# EAGLE board Maduino Zero 4G LTE CAT1 SIM7600X v1.3 (EAGLE 6.1), part 1 of 2
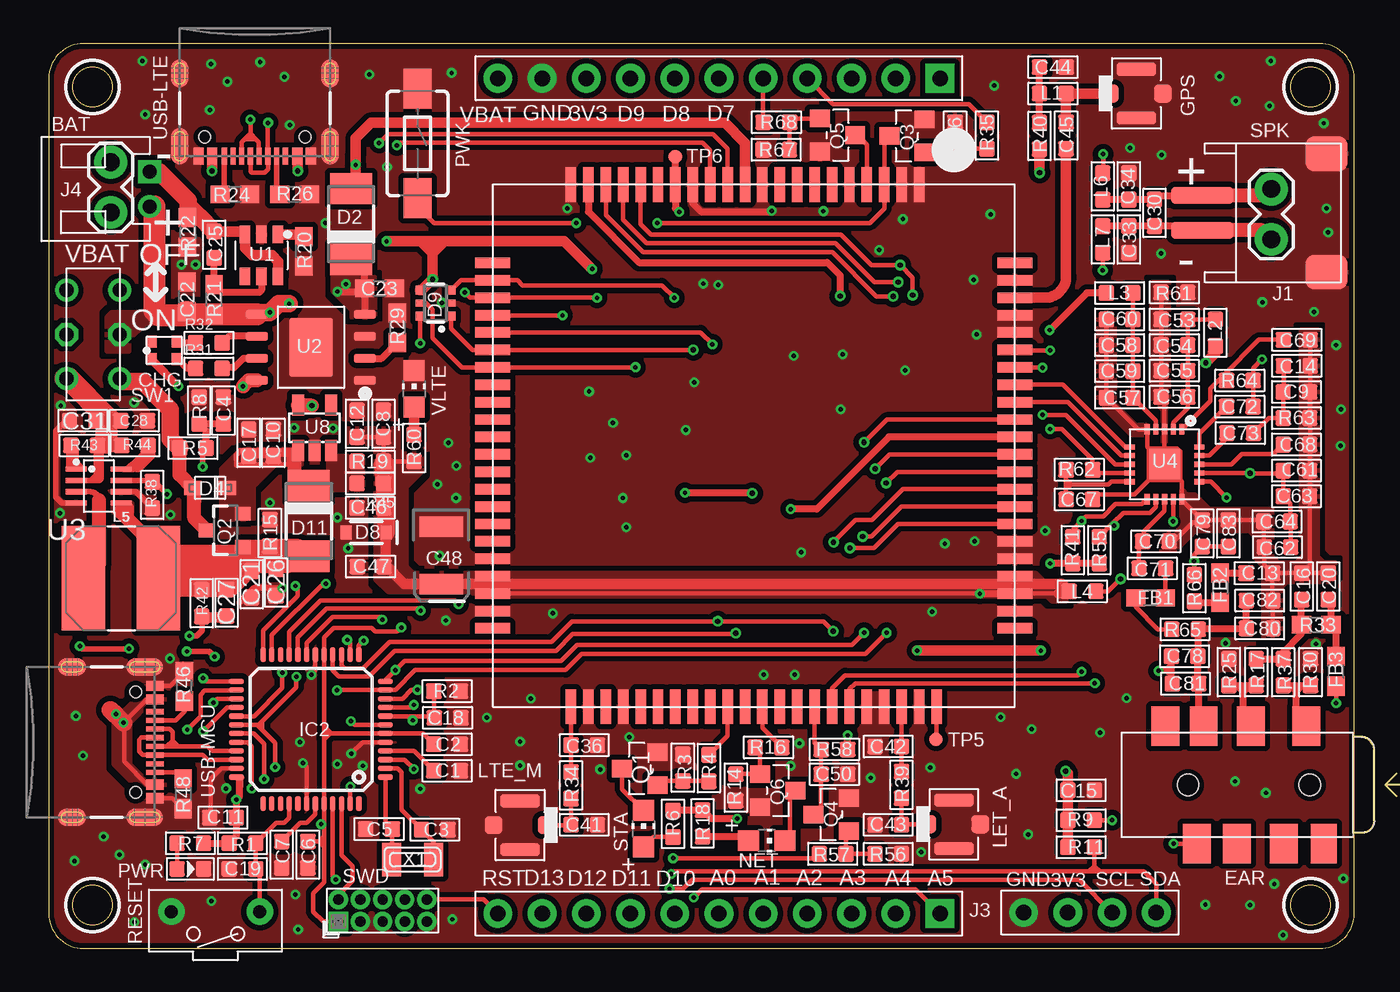
[diagram p0: board, top side]
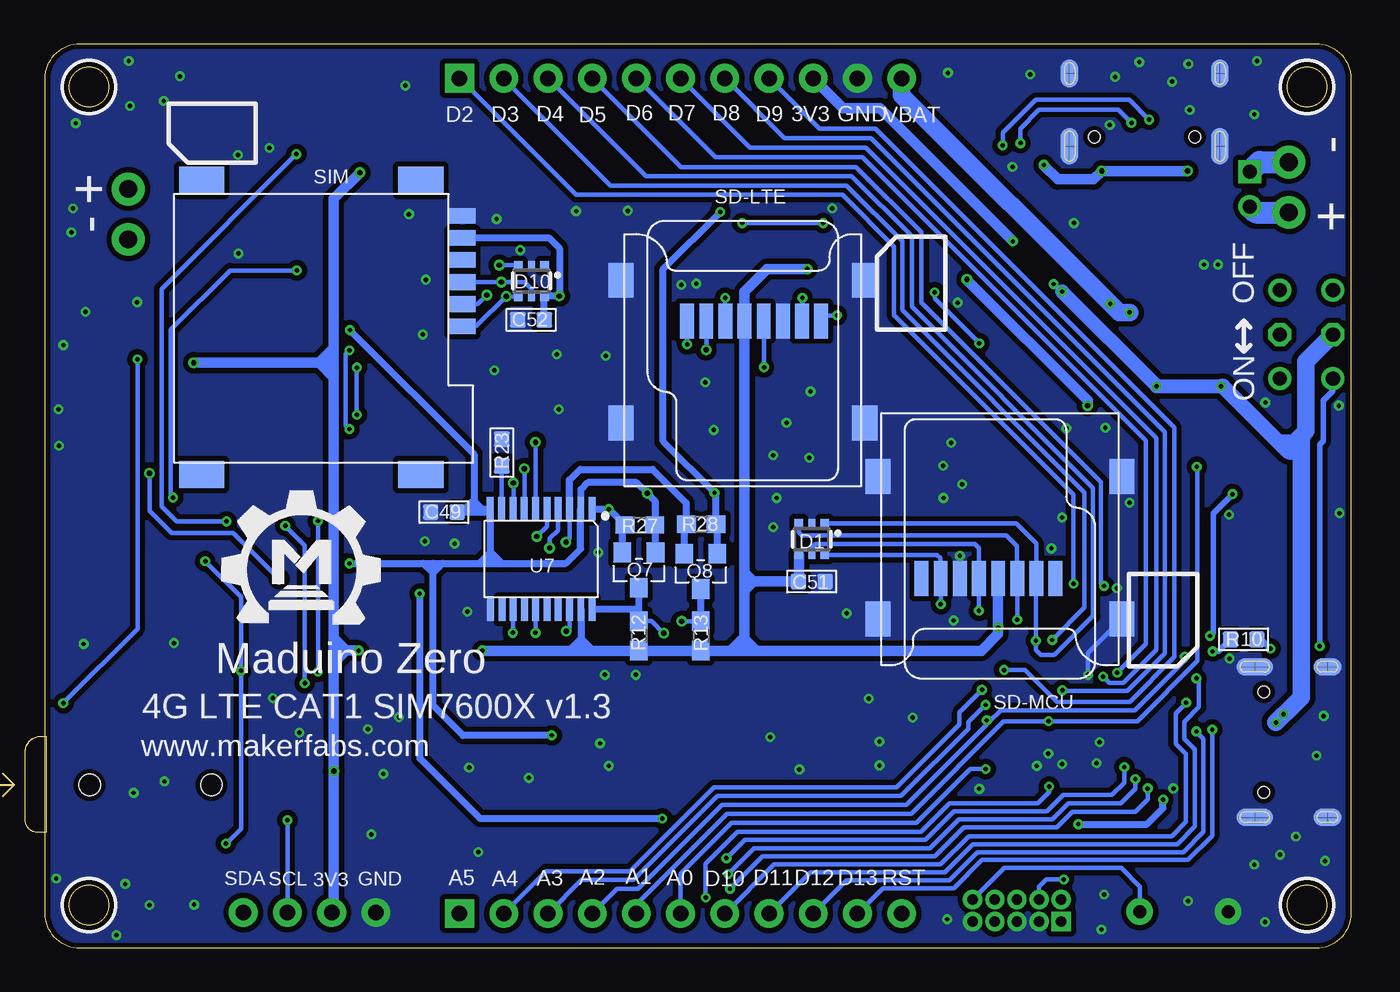
[diagram p1: board, bottom side, seen from below]

Size 75 x 52 mm. Coordinates in mm from the lower left corner, seen from the top.
Outline: 2,0 73,0 arc90 75,2 75,50 arc90 73,52 2,52 arc90 0,50 0,2 arc90 2,0
Outline: circle at 72.5,2.5 radius 1.14
Outline: circle at 72.5,49.5 radius 1.14
Outline: circle at 2.5,2.5 radius 1.14
Outline: circle at 2.5,49.5 radius 1.14
Copper layers (1*16): Top 0.035mm / dielectric 1.5mm / Bottom 0.035mm
Design rules: minimum track width 6mil, minimum drill 10mil, track to track 6mil, track to pad 6mil, pad to pad 6mil, via to via 6mil, smd to smd 0mil, copper to edge 10mil, drill to drill 10mil, minimum pad ring 10mil, minimum via ring 6mil, stop-mask expansion 2mil, vias tented up to drill 30mil, thermal gap 0mil
Net classes: 0 default: width 0.203 mm; 2 gnd: width 0.305 mm, drill 0.559 mm, clearance 0.254 mm; 3 usbvcc: width 0.508 mm, drill 0.61 mm, clearance 0.254 mm; 4 USBpair: width 0.254 mm, drill 0.406 mm, clearance 0.406 mm

## Footprints (pad centres in the part's own frame; a part is rotated, then mirrored left to right if it is on the bottom)
PH2.0-2P-90-DIP = drill 0.8 square: 1 0,1 | drill 0.8: 2 0,-1
0603 = smd 0.889 x 0.889: 1 -0.762,0; 2 0.762,0
0603' = smd 1.1 x 1: 1 -0.85,0; 2 0.85,0
C0603 = smd 0.889 x 0.889: 1 0,0.762; 2 0,-0.762
EIA3528 = smd 1.2 x 2.5: A 1.65,0; C -1.65,0
SMD4-160L160W = smd 0.6 x 0.7: 1 -0.7,0.5; 2 0.7,0.5; 3 -0.7,-0.5; 4 0.7,-0.5
PINHEAD_2X05_127 = drill 0.6 pad 1.016 square: 1 -0.635,2.54 | drill 0.6 pad 1.016: 2 0.635,2.54; 3 -0.635,1.27; 4 0.635,1.27; 5 -0.635,0; 6 0.635,0; 7 -0.635,-1.27; 8 0.635,-1.27; 9 -0.635,-2.54; 10 0.635,-2.54
SOT363 = smd 0.5 x 0.5: 1 -0.75,-0.9; 3 0.75,-0.9; 4 0.75,0.9; 6 -0.75,0.9 | smd 0.4 x 0.5: 2 0,-0.9; 5 0,0.9
DO-214AC = smd 1.8 x 2.4: A 2.025,0; C -2.025,0
SOD-323F = smd 1 x 0.8: A -1,0; C 1,0
SOD-323 = smd 0.63 x 0.83: A 1.15,0; C -1.15,0
AUDIO8P-SMD-3.5-14.5X6.1X4.0MM = smd 1.6 x 2.25: 1 3.9,-3.375; 2 7.1,-3.375; 3 9.8,-3.375; 4 10.2,3.375; 6 5.2,3.375; 7 7.9,3.375; 8 12,-3.375 | smd 1.5 x 2.25: 5 2.9,3.375 | hole 1.2: 3.7,0; 10.7,0
4P-U-FL = smd 1.016 x 1.016: D -1.524,0; GND3 1.524,0 | smd 2.286 x 0.762: GND1 0,1.397; GND2 0,-1.397
TQFP48-7X7 = smd 0.85 x 0.32: 1 -4.275,2.75; 2 -4.275,2.25; 3 -4.275,1.75; 4 -4.275,1.25; 5 -4.275,0.75; 6 -4.275,0.25; 7 -4.275,-0.25; 8 -4.275,-0.75; 9 -4.275,-1.25; 10 -4.275,-1.75; 11 -4.275,-2.25; 12 -4.275,-2.75; 25 4.275,-2.75; 26 4.275,-2.25; 27 4.275,-1.75; 28 4.275,-1.25; 29 4.275,-0.75; 30 4.275,-0.25; 31 4.275,0.25; 32 4.275,0.75; 33 4.275,1.25; 34 4.275,1.75; 35 4.275,2.25; 36 4.275,2.75 | smd 0.32 x 0.85: 13 -2.75,-4.275; 14 -2.25,-4.275; 15 -1.75,-4.275; 16 -1.25,-4.275; 17 -0.75,-4.275; 18 -0.25,-4.275; 19 0.25,-4.275; 20 0.75,-4.275; 21 1.25,-4.275; 22 1.75,-4.275; 23 2.25,-4.275; 24 2.75,-4.275; 37 2.75,4.275; 38 2.25,4.275; 39 1.75,4.275; 40 1.25,4.275; 41 0.75,4.275; 42 0.25,4.275; 43 -0.25,4.275; 44 -0.75,4.275; 45 -1.25,4.275; 46 -1.75,4.275; 47 -2.25,4.275; 48 -2.75,4.275
1X02_LOCK = drill 1.016 pad 1.88: 1 -0.178,0; 2 2.718,0
11P-2.54 = drill 0.889 pad 1.651 square: 1 0,12.7 | drill 0.889 pad 1.651: 2 0,10.16; 3 0,7.62; 4 0,5.08; 5 0,2.54; 6 0,0; 7 0,-2.54; 8 0,-5.08; 9 0,-7.62; 10 0,-10.16; 11 0,-12.7
4P-65/35ROUND = drill 0.889 pad 1.651: 1 0,3.81; 2 0,1.27; 3 0,-1.27; 4 0,-3.81
L0603 = smd 0.889 x 0.889: 1 -0.762,0; 2 0.762,0
SRN6045 = smd 2.5 x 6: 1 -2.175,0; 2 2.125,0
CHIP-LED0805 = smd 1.2 x 1.2: A 0,-1.05; C 0,1.05
TACTILE_SWITCH_SMD_6.0X3.5MM = smd 2.3 x 1.6: 1 -3.15,0; 2 3.15,0
LED-0603 = smd 0.889 x 0.889: + -0.762,0; - 0.762,0
SOT23 = smd 1.016 x 1.143: 1 -0.95,-1.016; 2 0.95,-1.016; 3 0,1.016
SOT23-3 = smd 0.8 x 0.9: 1 -0.95,-1; 2 0.95,-1; 3 0,1.1
R0603 = smd 0.889 x 0.889: 1 -0.762,0; 2 0.762,0
0603-NO = smd 1.1 x 1: 1 -0.85,0; 2 0.85,0
2P-7.62X3.56-90D = drill 0.762 pad 1.524: P$1 0,2.54; P$2 0,-2.54
8P-SMD = smd 0.8 x 2.008: 1 -3.198,0.254; 2 -2.098,0.254; 3 -0.998,0.254; 4 0.102,0.254; 5 1.202,0.254; 6 2.302,0.254; 7 3.402,0.254; 8 4.502,0.254 | smd 1.45 x 2: 9 -7.002,2.6; 10 7.002,2.6; 11 -7.002,-5.598; 12 7.002,-5.598
MICROSIM = smd 1.5 x 0.9: 1 -0.8,2.5; 2 -0.8,5.04; 3 -0.8,7.58; 5 -0.8,1.23; 6 -0.8,3.77; 7 -0.8,6.31 | smd 2.61 x 1.56: P$1 1.6,-0.8; P$2 14.2,-0.8; P$3 14.2,16.1; P$4 1.6,16.1
HW2-SMD-2.0-90D = smd 2 x 2.4: 3 3.4,-2.181; 4 -3.4,-2.181 | smd 1 x 3.6: + -1,4.953; - 1,4.953
6P-2CH-2.54-7.6X3.0 = drill 0.813 pad 1.27: CH1A -1.524,2.54; CH1B -1.524,-2.54; CH2A 1.524,2.54; CH2B 1.524,-2.54 | drill 0.813 pad 1.27 octagon: COM1 -1.524,0; COM2 1.524,0
PAD.03X.03 = smd 0.762 x 0.762: P$1 0,0
SOT-23-6 = smd 1 x 0.6: 1 -1.2,0.95; 2 -1.2,0; 3 -1.2,-0.95; 4 1.2,-0.95; 5 1.2,0; 6 1.2,0.95
SOP8-1.27P = smd 1.27 x 0.51: 1 -3.1,1.905; 2 -3.1,0.635; 3 -3.1,-0.635; 4 -3.1,-1.905; 5 3.1,-1.905; 6 3.1,-0.635; 7 3.1,0.635; 8 3.1,1.905 | smd 2.5 x 3.4: 9 0,0
TSOT23-8 = smd 1.2 x 0.3: 1 -1.3,0.975; 2 -1.3,0.325; 3 -1.3,-0.325; 4 -1.3,-0.975; 5 1.3,-0.975; 6 1.3,-0.325; 7 1.3,0.325; 8 1.3,0.975
QFN21-50P-400L400W = smd 0.6 x 0.3: 1 0,0; 2 0,-0.5; 3 0,-1; 4 0,-1.5; 5 0,-2; 11 4,-2; 12 4,-1.5; 13 4,-1; 14 4,-0.5; 15 4,0 | smd 0.3 x 0.6: 6 1,-3; 7 1.5,-3; 8 2,-3; 9 2.5,-3; 10 3,-3; 16 3,1; 17 2.5,1; 18 2,1; 19 1.5,1; 20 1,1 | smd 1.75 x 1.75: 21 2,-1
SMD87-100P-3000L300W = smd 2 x 0.6: 1 0,0; 2 0,-1; 3 0,-2; 4 0,-3; 5 0,-4; 6 0,-5; 7 0,-6; 8 0,-7; 9 0,-8; 10 0,-9; 11 0,-10; 12 0,-11; 13 0,-12; 14 0,-13; 15 0,-14; 16 0,-15; 17 0,-16; 18 0,-17; 19 0,-18; 20 0,-19; 41 30,-19; 42 30,-18; 43 30,-17; 44 30,-16; 45 30,-15; 46 30,-14; 47 30,-13; 48 30,-12; 49 30,-11; 50 30,-10; 51 30,-9; 52 30,-8; 53 30,-7; 54 30,-6; 55 30,-5; 56 30,-4; 57 30,-3; 58 30,-2; 59 30,-1; 60 30,0; 81 0,-20; 82 30,-20; 85 30,1 | smd 0.6 x 2: 21 5.5,-24.5; 22 6.5,-24.5; 23 7.5,-24.5; 24 8.5,-24.5; 25 9.5,-24.5; 26 10.5,-24.5; 27 11.5,-24.5; 28 12.5,-24.5; 29 13.5,-24.5; 30 14.5,-24.5; 31 15.5,-24.5; 32 16.5,-24.5; 33 17.5,-24.5; 34 18.5,-24.5; 35 19.5,-24.5; 36 20.5,-24.5; 37 21.5,-24.5; 38 22.5,-24.5; 39 23.5,-24.5; 40 24.5,-24.5; 61 24.5,5.5; 62 23.5,5.5; 63 22.5,5.5; 64 21.5,5.5; 65 20.5,5.5; 66 19.5,5.5; 67 18.5,5.5; 68 17.5,5.5; 69 16.5,5.5; 70 15.5,5.5; 71 14.5,5.5; 72 13.5,5.5; 73 12.5,5.5; 74 11.5,5.5; 75 10.5,5.5; 76 9.5,5.5; 77 8.5,5.5; 78 7.5,5.5; 79 6.5,5.5; 80 5.5,5.5; 83 25.5,-24.5; 84 4.5,-24.5; 86 4.5,5.5; 87 25.5,5.5
TSSOP20-0.65-6.5X4.4MM = smd 0.4 x 1.35: 1 -2.925,-2.875; 2 -2.275,-2.875; 3 -1.625,-2.875; 4 -0.975,-2.875; 5 -0.325,-2.875; 6 0.325,-2.875; 7 0.975,-2.875; 8 1.625,-2.875; 9 2.275,-2.875; 10 2.925,-2.875; 11 2.91,2.875; 12 2.26,2.875; 13 1.61,2.875; 14 0.96,2.875; 15 0.325,2.875; 16 -0.325,2.875; 17 -0.975,2.875; 18 -1.625,2.875; 19 -2.275,2.875; 20 -2.925,2.875
SOT23-5 = smd 0.69 x 1.2: 1 -0.95,-1.3; 2 0,-1.3; 3 0.95,-1.3; 4 0.95,1.3; 5 -0.95,1.3
USB-C-16P-5 = smd 0.3 x 1: A5 -1.25,-0.34; A6 -0.25,-0.34; A7 0.25,-0.34; A8 1.25,-0.34; B5 1.75,-0.34; B6 0.75,-0.34; B7 -0.75,-0.34; B8 -1.75,-0.34 | smd 0.6 x 1: GND -3.225,-0.34; GND2 3.225,-0.34; VBUS1 -2.45,-0.34; VBUS2 2.45,-0.34 | smd 1 x 2.1: SHLD1 -4.32,-0.915; SHLD2 4.32,-0.915 | smd 1 x 2.1 bottom: SHLD3 -4.32,-0.915; SHLD4 4.32,-0.915 | smd 1 x 1.6: SHLD5 -4.32,-5.095; SHLD8 4.32,-5.095 | smd 1 x 1.6 bottom: SHLD6 -4.32,-5.095; SHLD7 4.32,-5.095 | hole 0.65: -2.89,-1.445; 2.89,-1.445
XTAL3215 = smd 1.1 x 1.9: P$1 1.2,0; P$2 -1.2,0

## Placement (x,y rotation side)
BAT  PH2.0-2P-90-DIP  [PH2.0-2P-90-DIP]  5.79,43.64 0 top
C1  1uF  [0603]  22.89,10.21 0 top
C2  100nF  [0603]  22.89,11.73 180 top
C3  22pF  [0603]  22.17,6.83 0 top
C4  0.1uF  [0603]  10.03,30.91 90 top
C5  22pF  [0603]  18.97,6.86 180 top
C6  100nF  [0603]  14.88,5.38 270 top
C7  1uF  [0603]  13.39,5.38 270 top
C8  10uF  [0603]  19.23,30.15 270 top
C9  10pF  [0603]  71.68,31.98 180 top
C10  4.7uF  [0603]  12.9,29.06 270 top
C11  4.7uF  [0603]  10.01,7.52 0 top
C12  1uF  [0603]  17.7,30.15 270 top
C13  1uF  [0603]  69.55,21.56 0 top
C14  100nF  [0603]  71.7,33.48 180 top
C15  100nF  [0603]  59.31,9.09 0 top
C16  10pF  [0603]  71.98,20.8 270 top
C17  10uF  [0603]  11.48,29.06 270 top
C18  0.1uF  [0603]  22.91,13.26 0 top
C19  0.1uF  [0603]  11.13,4.57 0 top
C20  10pF  [0603]  73.51,20.8 270 top
C21  10uF  [0603]  11.66,20.93 90 top
C22  10uF  [0603']  7.92,37.44 90 top
C23  1.0uF  [0603']  19,37.92 0 top
C25  0.1uF  [0603]  9.5,40.44 270 top
C26  1uF  [0603]  13.06,21.03 90 top
C27  33pF  [0603]  10.21,19.86 90 top
C28  10uF  [0603]  4.9,30.33 180 top
C30  NC  [C0603]  63.53,42.27 0 top
C31  0.1uF  [0603]  1.96,30.33 0 top
C33  33pF  [C0603]  62.05,40.74 0 top
C34  33pF  [C0603]  62.05,43.79 180 top
C36  NC  [0603]  30.76,11.68 180 top
C41  NC  [0603]  30.76,7.11 180 top
C42  NC  [0603]  48.23,11.61 0 top
C43  NC  [0603]  48.23,7.11 0 top
C44  33pF  [0603]  57.68,50.65 0 top
C45  0R  [0603]  58.45,46.71 270 top
C46  10uF  [0603]  18.47,25.32 0 top
C47  1uF  [0603]  18.49,21.95 0 top
C48  100uF  [EIA3528]  22.56,22.58 270 top
C49  100nF  [0603]  52.1,25.07 0 bottom
C50  0.1uF  [0603]  45.14,10.01 180 top
C51  100nF  [0603]  30.96,21.08 0 bottom
C52  0.1uF  [0603]  47.09,36.12 0 bottom
C53  10uF  [0603]  64.67,36.14 0 top
C54  0.1uF  [0603]  64.67,34.67 0 top
C55  10pF  [0603]  64.67,33.2 0 top
C56  33pF  [0603]  64.67,31.7 0 top
C57  10uF  [0603]  61.52,31.65 0 top
C58  0.1uF  [0603]  61.52,34.67 0 top
C59  10pF  [0603]  61.52,33.17 0 top
C60  33pF  [0603]  61.52,36.14 0 top
C61  10uF  [0603]  71.68,27.46 180 top
C62  0.1uF  [0603]  70.59,23.06 0 top
C63  10pF  [0603]  71.68,25.98 180 top
C64  33pF  [0603]  70.56,24.54 0 top
C67  10pF  [0603]  59.21,25.81 180 top
C68  4.7uF  [0603]  71.68,28.96 180 top
C69  4.7uF  [0603]  71.7,34.98 180 top
C70  10pF  [0603]  63.6,23.39 180 top
C71  1uF  [0603]  63.4,21.84 180 top
C72  1uF  [0603]  68.43,31.14 180 top
C73  1uF  [0603]  68.45,29.62 180 top
C78  10pF  [0603]  65.25,16.79 0 top
C79  10pF  [0603]  66.27,23.85 270 top
C80  10pF  [0603]  69.57,18.39 0 top
C81  10pF  [0603]  65.3,15.21 0 top
C82  10pF  [0603]  69.57,19.99 0 top
C83  10pF  [0603]  67.77,23.85 270 top
CHG  [SMD4-160L160W]  6.63,34.37 180 top
CN2  PINHEAD-2x5-P1.27  [PINHEAD_2X05_127]  19.18,2.18 90 top
D1  SMF05C  [SOT363]  30.96,23.52 180 bottom
D2  SS34  [DO-214AC]  17.37,41.63 90 top
D4  [SOD-323F]  9.27,26.47 0 top
D8  5.6V  [SOD-323]  18.24,23.9 180 top
D9  SMF05C  [SOT363]  22.23,37.08 90 top
D10  SMF05C  [SOT363]  47.07,38.35 180 bottom
D11  SS34  [DO-214AC]  14.94,24.56 270 top
EAR  AUDIO-JACK-8P-SMD  [AUDIO8P-SMD-3.5-14.5X6.1X4.0MM]  76.15,9.4 180 top
FB1  120Ω  [0603']  63.3,20.14 180 top
FB2  120Ω  [0603']  67.28,20.73 270 top
FB3  120Ω  [0603']  73.96,15.93 90 top
GPS  [4P-U-FL]  62.48,49.12 0 top
IC2  SAMD21G18A-AUT  [TQFP48-7X7]  15.06,12.6 180 top
J1  [1X02_LOCK]  70.23,43.46 270 top
J2  [11P-2.54]  38.5,50 270 top
J3  [4P-65/35ROUND]  59.82,2.06 270 top
J4  [1X02_LOCK]  3.56,42.47 90 top
J8  [11P-2.54]  38.5,2 270 top
L1  47nH  [L0603]  57.68,49.12 0 top
L2  47nH  [L0603]  67.03,35.38 90 top
L3  47nH  [L0603]  61.52,37.67 0 top
L4  47nH  [L0603]  59.39,20.52 0 top
L5  4.7µH/±20%/3A  [SRN6045]  4.17,21.29 0 top
L6  120R  [L0603]  60.55,43.79 270 top
L7  120R  [L0603]  60.55,40.74 90 top
LET_A  [4P-U-FL]  51.99,7.14 0 top
LTE_M  [4P-U-FL]  27.08,7.09 180 top
NET  NET  [CHIP-LED0805]  41.25,6.2 270 top
PWK  MOMENTARY-SWITCH-SPST-SMD-6.0X3.5MM  [TACTILE_SWITCH_SMD_6.0X3.5MM]  21.18,46.25 270 top
PWR  RED  [LED-0603]  8.13,4.57 0 top
Q1  BC847C  [SOT23]  33.96,10.34 90 top
Q2  MOSFET-PCHANNEL  [SOT23-3]  10.16,24.03 90 top
Q3  2N7002  [SOT23]  49.3,46.69 90 top
Q4  2N7002  [SOT23]  44.96,7.7 90 top
Q5  2N7002  [SOT23]  45.31,46.74 270 top
Q6  BC847C  [SOT23]  41.88,9.07 270 top
Q7  NC  [SOT23]  40.89,21.74 180 bottom
Q8  NC  [SOT23]  37.34,21.67 180 bottom
R1  10k  [R0603]  11.13,6.05 180 top
R2  1M  [R0603]  22.89,14.78 180 top
R3  10K  [R0603]  36.42,10.39 270 top
R4  1K  [R0603]  37.92,10.36 90 top
R5  1M/1%  [R0603]  8.28,28.75 180 top
R6  1K  [R0603]  35.86,7.16 90 top
R7  1K  [R0603]  8.13,6.05 180 top
R8  1M/1%  [R0603]  8.64,30.91 270 top
R9  4.7K  [R0603]  59.31,7.37 180 top
R10  1M  [R0603]  6.15,17.75 0 bottom
R11  4.7K  [R0603]  59.31,5.82 180 top
R12  30K  [0603']  40.89,17.96 270 bottom
R13  30K  [0603']  37.34,17.96 270 bottom
R14  10K  [R0603]  39.47,9.25 90 top
R15  100k  [R0603]  12.7,23.88 90 top
R16  1K  [R0603]  41.35,11.56 0 top
R17  NC  [R0603]  69.37,15.88 270 top
R18  1K  [R0603]  37.57,7.19 90 top
R19  0R  [R0603]  18.47,27.99 180 top
R20  1K  [0603']  14.66,40.06 90 top
R21  100R  [0603']  9.5,37.29 90 top
R22  NC  [0603']  7.98,41.15 270 top
R23  10K  [R0603]  48.77,28.5 270 bottom
R24  5.1K  [0603-NO]  10.69,43.33 0 top
R25  0R  [R0603]  67.79,15.88 90 top
R26  5.1K  [0603-NO]  14.12,43.33 0 top
R27  10K  [0603']  40.84,24.33 0 bottom
R28  10K  [0603']  37.31,24.38 0 bottom
R29  1.2k  [0603']  20.02,35.66 270 top
R30  NC  [R0603]  72.49,15.88 90 top
R31  47R  [R0603]  9.19,33.32 0 top
R32  47R  [R0603]  9.19,34.8 0 top
R33  68R  [0603-NO]  72.82,18.59 0 top
R34  0R  [R0603]  30,9.37 270 top
R35  1K  [R0603]  53.9,46.71 90 top
R36  10K  [R0603]  52.07,46.71 270 top
R37  0R  [R0603]  70.92,15.88 270 top
R38  33K  [R0603]  5.94,26.06 90 top
R39  0R  [R0603]  49,9.4 270 top
R40  10R  [R0603]  56.92,46.69 270 top
R41  2.2K  [R0603]  58.83,22.89 90 top
R42  200K  [R0603]  8.79,19.84 90 top
R43  100K  [R0603]  2.03,28.91 0 top
R44  200K  [R0603]  4.95,28.91 180 top
R45  0R  [R0603]  18.47,26.72 180 top
R46  5.1K  [0603-NO]  7.8,15.06 90 top
R48  5.1K  [0603-NO]  7.72,8.89 270 top
R55  2.2K  [R0603]  60.35,22.89 90 top
R56  10K  [R0603]  48.23,5.44 180 top
R57  1K  [R0603]  45.03,5.44 180 top
R58  2.2K  [R0603]  45.14,11.43 0 top
R60  1K  [R0603]  20.98,28.75 270 top
R61  0R  [R0603]  64.67,37.69 180 top
R62  0  [R0603]  59.21,27.51 0 top
R63  2.2K  [R0603]  71.68,30.48 180 top
R64  2.2K  [R0603]  68.43,32.64 180 top
R65  0R  [R0603]  65.28,18.34 180 top
R66  0  [R0603]  65.81,20.7 270 top
R67  10K  [R0603]  41.78,45.9 0 top
R68  1K  [R0603]  41.81,47.47 180 top
RESET  [2P-7.62X3.56-90D]  9.58,2.11 270 top
SD-LTE  SD  [8P-SMD]  34.92,35.79 0 bottom
SD-MCU  SD  [8P-SMD]  20.16,21.53 180 bottom
SIM  MICROSIM  [MICROSIM]  51.82,43.33 180 bottom
SPK  JST-2P  [HW2-SMD-2.0-90D]  71.22,42.27 90 top
STA  STATUS  [CHIP-LED0805]  34.16,6.88 0 top
SW1  [6P-2CH-2.54-7.6X3.0]  2.54,35.28 180 top
TP5  TEST-POINT3  [PAD.03X.03]  50.98,12.01 0 top
TP6  TEST-POINT3  [PAD.03X.03]  35.99,45.49 0 top
U1  DW06D  [SOT-23-6]  12.22,39.83 270 top
U2  TP4056  [SOP8-1.27P]  15.06,34.54 180 top
U3  MP2143DJ-LF-Z  [TSOT23-8]  2.87,26.57 0 top
U4  NAU8810  [QFN21-50P-400L400W]  65.1,29.82 270 top
U6  SIM7600  [SMD87-100P-3000L300W]  50,43.89 270 top
U7  TXS0108E  [TSSOP20-0.65-6.5X4.4MM]  46.51,22.38 180 bottom
U8  SPX3819  [SOT23-5]  15.27,29.92 0 top
U$1  [MAKERFABS_0.3]  64.4,18.69 0 bottom
USB-LTE  [USB-C-16P-5]  11.84,45.19 180 top
USB-MCU  [USB-C-16P-5]  6.43,11.86 270 top
VLTE  LED2  [CHIP-LED0805]  20.98,32.16 0 top
X1  32.768K  [XTAL3215]  20.9,5.11 0 top

## Library data of the parts
BAT GPS J2 J3 J8 LET_A LTE_M SD-LTE SD-MCU SIM = Connector
C1-C21 C25-C28 C31 C36 C41-C47 C49-C64 C67-C73 C78-C83 L1-L4 PWR Q1 Q3-Q8 R1-R11 R14-R19 R23 R25 R30-R32 R34-R45 R55-R58 R60-R68 RESET SW1 = Discrete
C22 C23 = SparkFun-Capacitors; PROD_ID: CAP-00868
C30 C33 C34 L6 L7 = Discrete-new
C48 = SparkFun-Capacitors; PROD_ID: CAP-10790
CHG U1 U2 = self
CN2 = Connettori
D1 D9 D10 R24 R26 R33 R46 R48 = microbuilder
D2 D11 = diode
D4 NET STA VLTE X1 = adafruit2
D8 = SparkFun-DiscreteSemi; PROD_ID: DIO-12442
EAR SPK = Connector-new
FB1-FB3 = SparkFun-Coils; PROD_ID: NDUC-13805
IC2 U8 = IC
J1 J4 TP5 TP6 = SparkFun-Connectors
L5 = SparkFun-Coils; PROD_ID: NDUC-11627; VALUE: 33µH/±20%/1.4A
PWK = SparkFun-Switches; PROD_ID: SWCH-00815; SF_SKU: COM-08229
Q2 = User-Submitted; PROD_ID: TRANS-08285
R12 R13 R27 R28 = SparkFun-Resistors; PROD_ID: RES-10809
R20-R22 = SparkFun-Resistors; PROD_ID: RES-00824
R29 = SparkFun-Resistors; PROD_ID: RES-09568
U3 = sale
U4 U6 = user01
U7 = IC-new
U$1 = Logo
USB-LTE USB-MCU = USBC

## Nets
1.8V: C49.2 L3.1 Q7.1 Q8.1 R27.2 R28.2 R41.1 R55.1 R58.2 TP6.P$1 U6.15 U7.2 U7.10
+3V3: C2.2 C6.1 C11.2 C15.1 C51.1 CN2.1 D1.4 D9.4 IC2.6 IC2.17 IC2.36 IC2.44 J2.9 J3.3 L2.1 R1.2 R7.1 R9.2 R11.2 R12.2 R13.2 R40.2 SD-LTE.4 SD-MCU.4 U7.19 U8.5
A0: IC2.3 J8.6
A1: C4.1 IC2.7 J8.5 R5.1 R8.2
A2: C18.1 IC2.8 J8.4 R2.2 R10.1
A3: IC2.9 J8.3
A4: IC2.10 J8.2
A5: IC2.47 J8.1
ADC1: U6.47
ADC2: U6.46
AGND: C9.1 C13.2 C14.1 C16.1 C20.1 C53.1 C54.1 C55.1 C56.1 C57.1 C58.1 C59.1 C60.1 C61.1 C62.1 C63.1 C64.1 C67.1 C68.1 C69.1 C70.1 C79.1 C80.2 C82.2 C83.1 R61.2 R63.1 U4.3 U4.5 U4.15 U4.21
AREFA: C1.1 IC2.4
CTS: U6.67 U7.5
D0: IC2.16 Q7.3 R12.1 U7.20
D1: IC2.15 Q8.3 R13.1 U7.18
D2: IC2.23 J2.1
D3: IC2.14 J2.2
D4: D1.1 IC2.13 J2.3 SD-MCU.2
D5: IC2.24 J2.4 R35.2
D6: IC2.29 J2.5 R68.2
D7: IC2.30 J2.6 R57.2
D8: IC2.11 J2.7 U7.13
D9: IC2.12 J2.8 U7.15
D10: IC2.27 J8.7
D11: IC2.25 J8.8
D12: IC2.28 J8.9
D13: IC2.26 J8.10
D+: IC2.34 USB-MCU.A6 USB-MCU.B6
D-: IC2.33 USB-MCU.A7 USB-MCU.B7
DCD: U6.70 U7.7
DN: U6.12 USB-LTE.A7 USB-LTE.B7
DONE: R32.2 U2.6
DP: U6.13 USB-LTE.A6 USB-LTE.B6
DTR: U6.72 U7.6
EAR_N: C13.1 FB2.1
EAR_P: C71.1 FB1.1
FLIGHTMODE: C50.2 Q4.3 R58.1 U6.54
GND: C1.2 C2.1 C3.2 C4.2 C5.2 C6.2 C7.2 C8.1 C10.1 C11.1 C12.1 C15.2 C17.1 C18.2 C19.1 C21.1 C22.2 C23.2 C26.1 C28.1 C31.1 C33.2 C34.2 C36.1 C41.1 C42.1 C43.1 C44.2 C46.1 C47.1 C48.C C49.1 C50.1 C51.2 C52.1 CN2.3 CN2.5 CN2.9 D1.2 D8.A D9.2 D10.2 GPS.GND1 GPS.GND2 GPS.GND3 IC2.5 IC2.18 IC2.35 IC2.42 J2.10 J3.4 LET_A.GND1 LET_A.GND2 LET_A.GND3 LTE_M.GND1 LTE_M.GND2 LTE_M.GND3 PWK.1 PWR.- Q1.2 Q3.2 Q4.2 Q5.2 Q6.2 R2.1 R3.1 R8.1 R14.1 R15.2 R20.1 R22.2 R23.1 R24.2 R25.2 R26.2 R29.1 R30.2 R36.1 R38.1 R46.2 R48.2 R56.1 R61.1 R67.1 RESET.P$2 SD-LTE.6 SD-LTE.9 SD-LTE.10 SD-LTE.11 SD-LTE.12 SD-MCU.6 SD-MCU.9 SD-MCU.10 SD-MCU.11 SD-MCU.12 SIM.5 SPK.3 SPK.4 U1.2 U2.1 U2.3 U2.9 U3.4 U3.6 U6.1 U6.2 U6.5 U6.10 U6.14 U6.37 U6.40 U6.41 U6.43 U6.57 U6.58 U6.60 U6.61 U6.64 U6.65 U6.77 U6.78 U6.80 U6.81 U7.11 U8.2 USB-LTE.GND USB-LTE.GND2 USB-LTE.SHLD1 USB-LTE.SHLD2 USB-LTE.SHLD3 USB-LTE.SHLD4 USB-LTE.SHLD5 USB-LTE.SHLD6 USB-LTE.SHLD7 USB-LTE.SHLD8 USB-MCU.GND USB-MCU.GND2 USB-MCU.SHLD1 USB-MCU.SHLD2 USB-MCU.SHLD3 USB-MCU.SHLD4 USB-MCU.SHLD5 USB-MCU.SHLD6 USB-MCU.SHLD7 USB-MCU.SHLD8 VLTE.C
I2C_SCL: R41.2 U4.11 U6.55
I2C_SDA: R55.2 U4.12 U6.56
ISET: R29.2 U2.2
ISINK: U6.45
MIC_N: C9.2 C14.2 C73.1 R63.2
MIC_P: C72.1 FB3.1 R64.1
MICBIAS: C69.2 R64.2 U4.1
MISO: D1.6 IC2.21 SD-MCU.7
MOSI: D1.3 IC2.19 SD-MCU.3
N$1: Q1.1 R3.2 R4.1
N$2: R6.1 STA.A
N$3: PWR.+ R7.2
N$4: Q1.3 STA.C
N$5: Q6.1 R14.2 R16.1
N$6: NET.A R18.1
N$7: NET.C Q6.3
N$8: TP5.P$1 U6.85
N$9: C25.2 R21.2 U1.5
N$10: R20.2 U1.1
N$11: CHG.3 R32.1
N$12: R31.2 U2.7
N$13: CHG.1 R31.1
N$14: C16.2 R17.1 R33.1 R37.1
N$15: C20.2 FB3.2 R33.2
N$16: EAR.2 R17.2 R25.1
N$17: R26.1 USB-LTE.A5
N$19: R24.1 USB-LTE.B5
N$20: EAR.1 R30.1 R37.2
N$21: C78.1 C79.2 C81.1 C83.2 EAR.4 R66.1
N$22: L5.1 U3.3
N$23: C27.1 R38.2 R42.1 U3.7
N$24: R23.2 U7.9
N$25: R46.1 USB-MCU.A5
N$26: R48.1 USB-MCU.B5
N$27: R43.1 U3.1
N$28: R44.1 U3.8
N$40: C36.2 R34.1 U6.82
N$41: C41.2 LTE_M.D R34.2
N$42: PWK.2 Q3.3 U6.3
N$43: Q3.1 R35.1 R36.2
N$46: R60.1 VLTE.A
N$48: C53.2 C54.2 C55.2 C56.2 L2.2 U4.2
N$49: C70.2 C71.2 U4.13
N$50: C61.2 C62.2 C63.2 C64.2 L4.2 U4.17
N$51: C68.2 U4.18
N$52: C57.2 C58.2 C59.2 C60.2 L3.2 U4.4
N$54: C73.2 U4.19
N$57: C67.2 R62.1 U4.10
N$58: C72.2 U4.20
N$59: FB1.2 R65.2
N$63: FB2.2 R66.2
N$64: C78.2 C80.1 C81.2 C82.1 EAR.3 R65.1
N$69: Q5.3 U6.4
N$70: Q5.1 R67.2 R68.1
N$72: C43.2 LET_A.D R39.2
N$73: C44.1 L1.1 R40.1
N$74: C42.2 R39.1 U6.59
N$75: C45.2 U6.79
N$76: C45.1 GPS.D L1.2
N$94: Q4.1 R56.2 R57.1
NETLED: R16.2 U6.51
PA00_XIN32: C5.1 IC2.1 X1.P$2
PA01_XOUT32: C3.1 IC2.2 X1.P$1
PCM_CLK: R62.2 U4.9 U6.76
PCM_IN: U4.6 U6.74
PCM_OUT: U4.7 U6.73
PCM_SYNC: U4.8 U6.75
RESET: C19.2 CN2.10 IC2.40 J8.11 R1.1 RESET.P$1
RI: U6.69 U7.8
RTS: U6.66 U7.4
RXD: Q8.2 R28.1 U6.68 U7.3
SCK: D1.5 IC2.20 SD-MCU.5
SCL: IC2.32 J3.2 R9.1
SD_CMD: D9.3 SD-LTE.3 U6.21
SD_DATA0: D9.6 SD-LTE.7 U6.22
SD_DATA1: SD-LTE.8 U6.23
SD_DATA2: SD-LTE.1 U6.24
SD_DATA3: D9.1 SD-LTE.2 U6.25
SD_SCK: D9.5 SD-LTE.5 U6.26
SDA: IC2.31 J3.1 R11.1
SIM_CLK: D10.4 SIM.3 U6.19
SIM_DATA: D10.3 SIM.7 U6.17
SIM_RST: D10.5 SIM.2 U6.18
SIM_VDD: C52.2 D10.6 SIM.1 U6.20
SPK_N: C30.2 C33.1 J1.2 L7.2 SPK.+
SPK_P: C30.1 C34.1 J1.1 L6.2 SPK.-
SPKOUT_N: L7.1 U4.16
SPKOUT_P: L6.1 U4.14
STATUS: R4.2 U6.49
SWCLK: CN2.4 IC2.45
SWDIO: CN2.2 IC2.46
TXD: Q7.2 R27.1 U6.71 U7.1
V4D2: C21.2 C26.2 C27.2 D11.A L5.2 Q2.1 R15.1 R42.2 U3.5
V_BATT: C8.2 C12.2 C46.2 C47.2 C48.A D8.C L4.1 R6.2 R18.2 R19.1 R45.1 R60.2 U6.38 U6.39 U6.62 U6.63
VBAT+: BAT.2 C22.1 J2.11 J4.1 R21.1 SW1.COM1 U2.5
VBAT-: BAT.1 C25.1 J4.2 R22.1 U1.3 U1.6
VBAT_IN: D4.A Q2.3 R5.2 SW1.CH1A
VBUS: C23.1 CHG.2 D2.C SW1.COM2 U2.4 U2.8 USB-MCU.VBUS1 USB-MCU.VBUS2
VDDCORE: C7.1 IC2.43
VIN: C10.2 C17.2 D4.C D11.C Q2.2 R19.2 R45.2 U8.1 U8.3
VSYS: C28.2 C31.2 R10.2 R43.2 R44.2 SW1.CH2A U3.2
VUSB: D2.A U6.11 USB-LTE.VBUS1 USB-LTE.VBUS2